# EAGLE board combo (EAGLE 7.2.0)
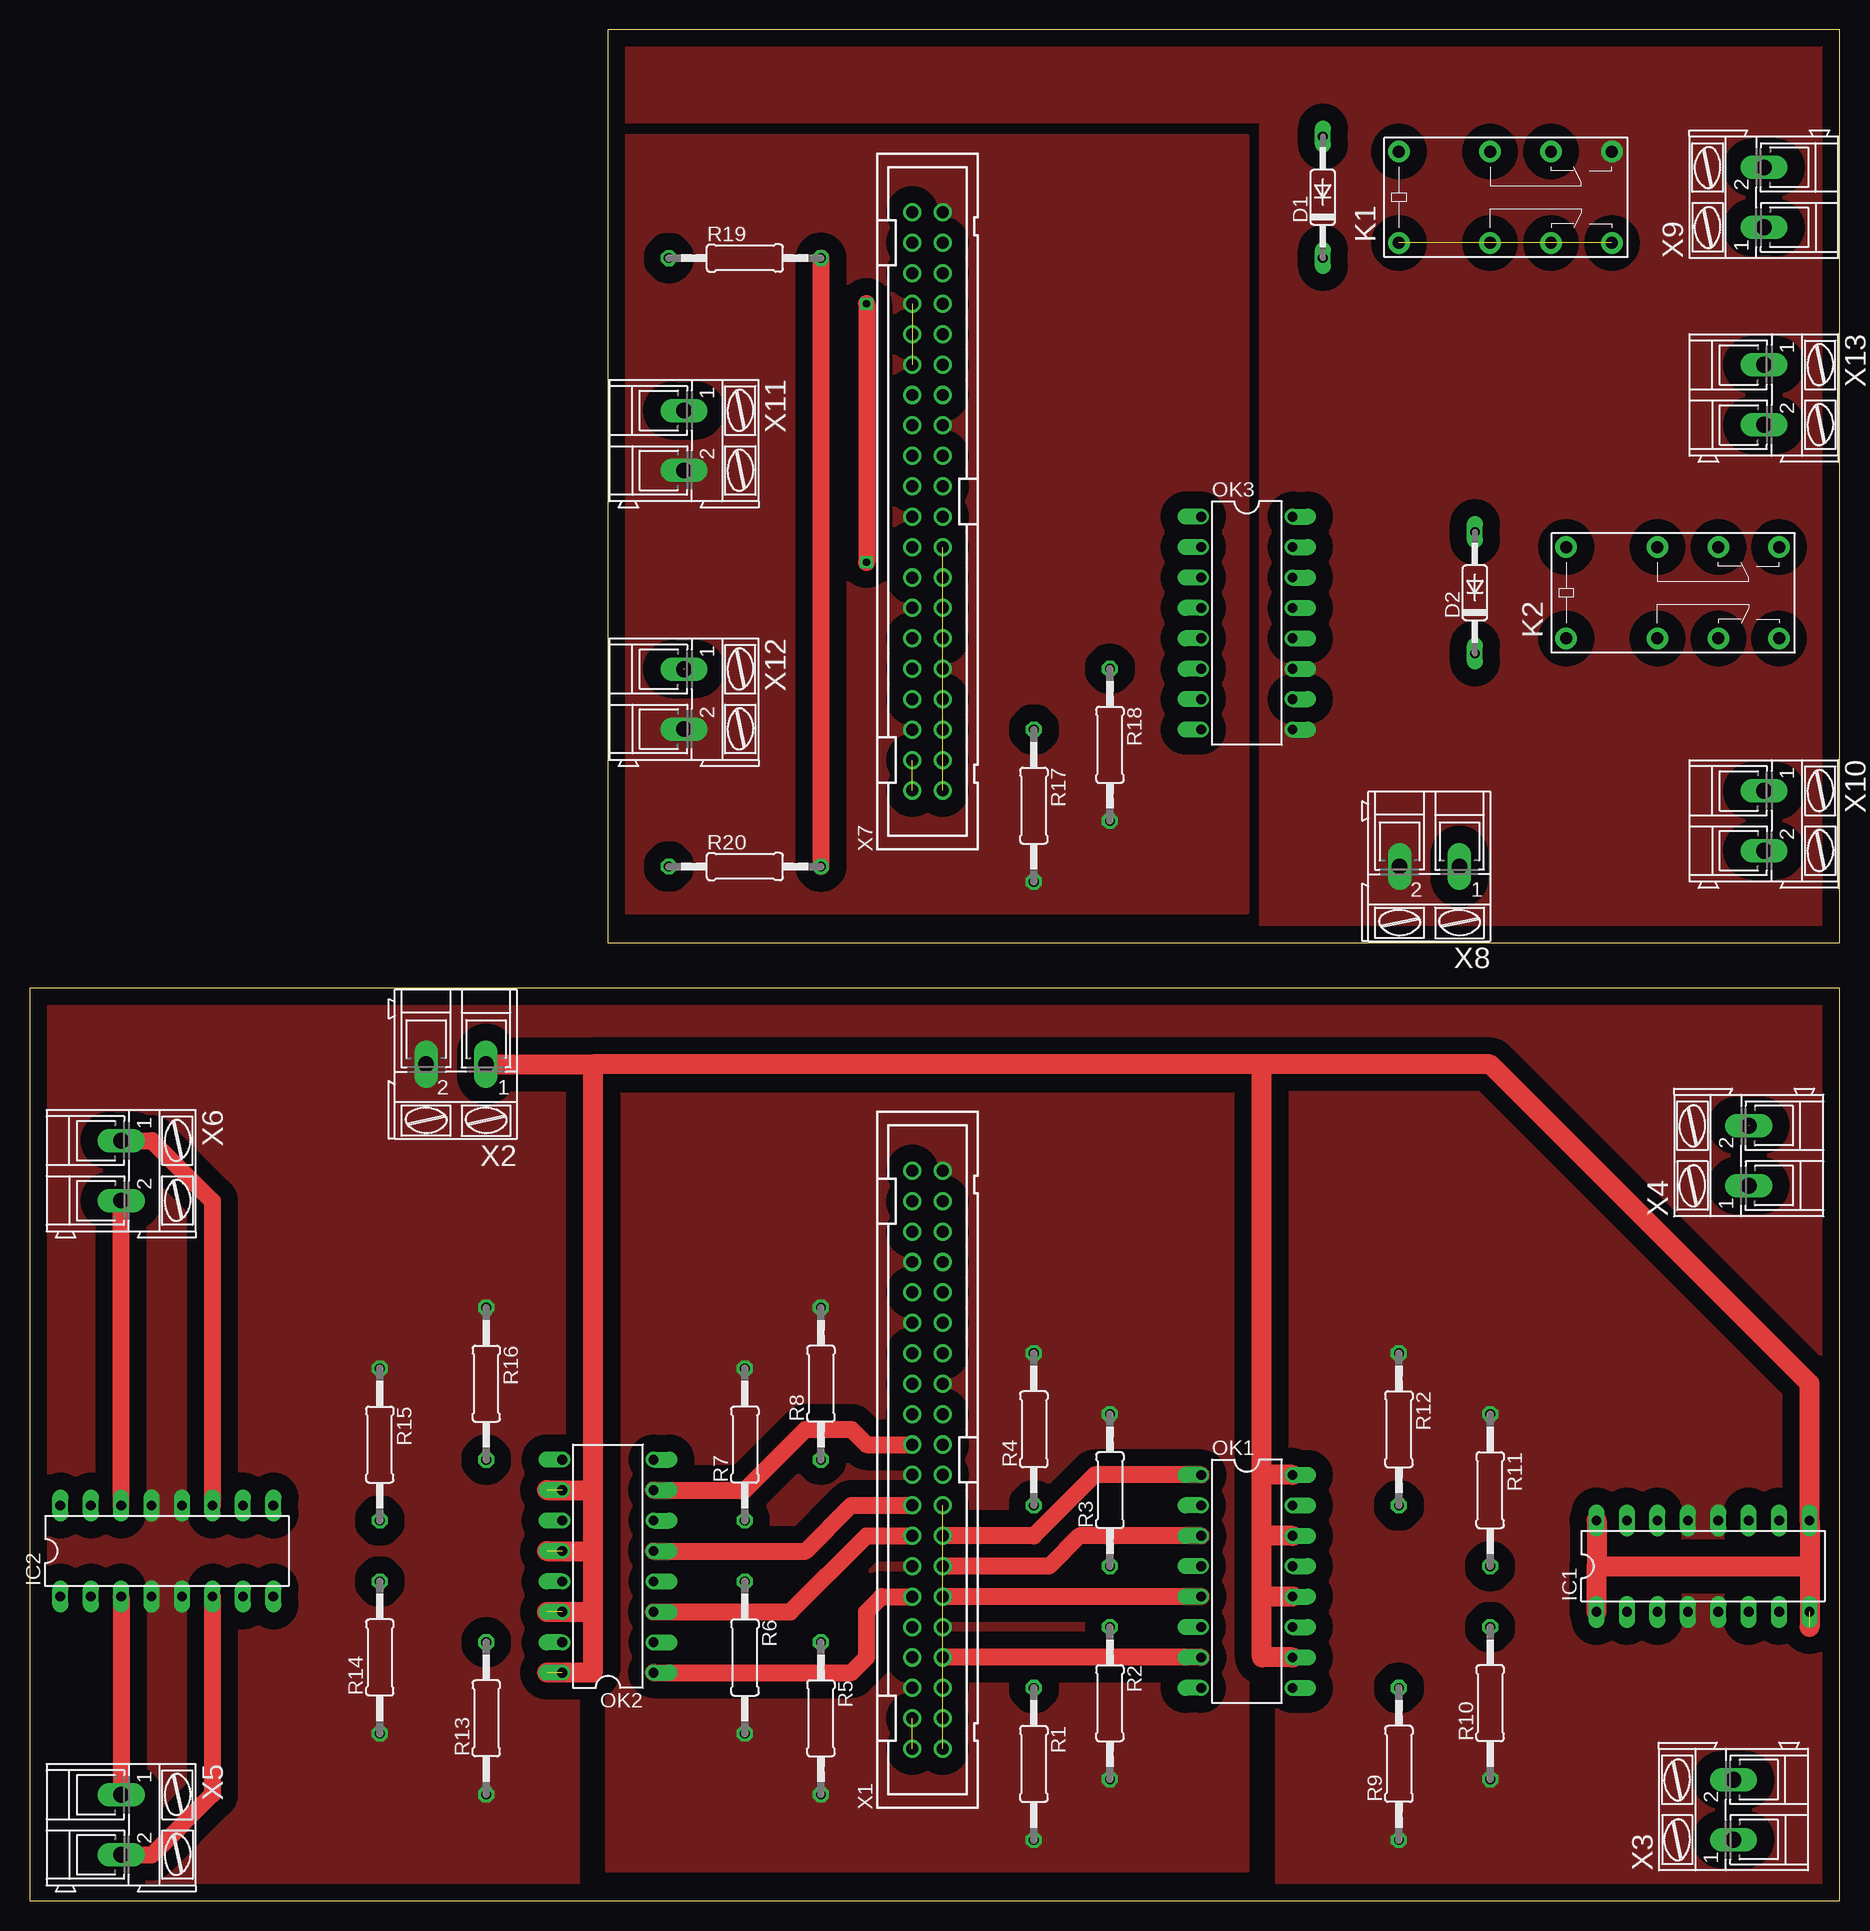
[diagram p0: board, top side]
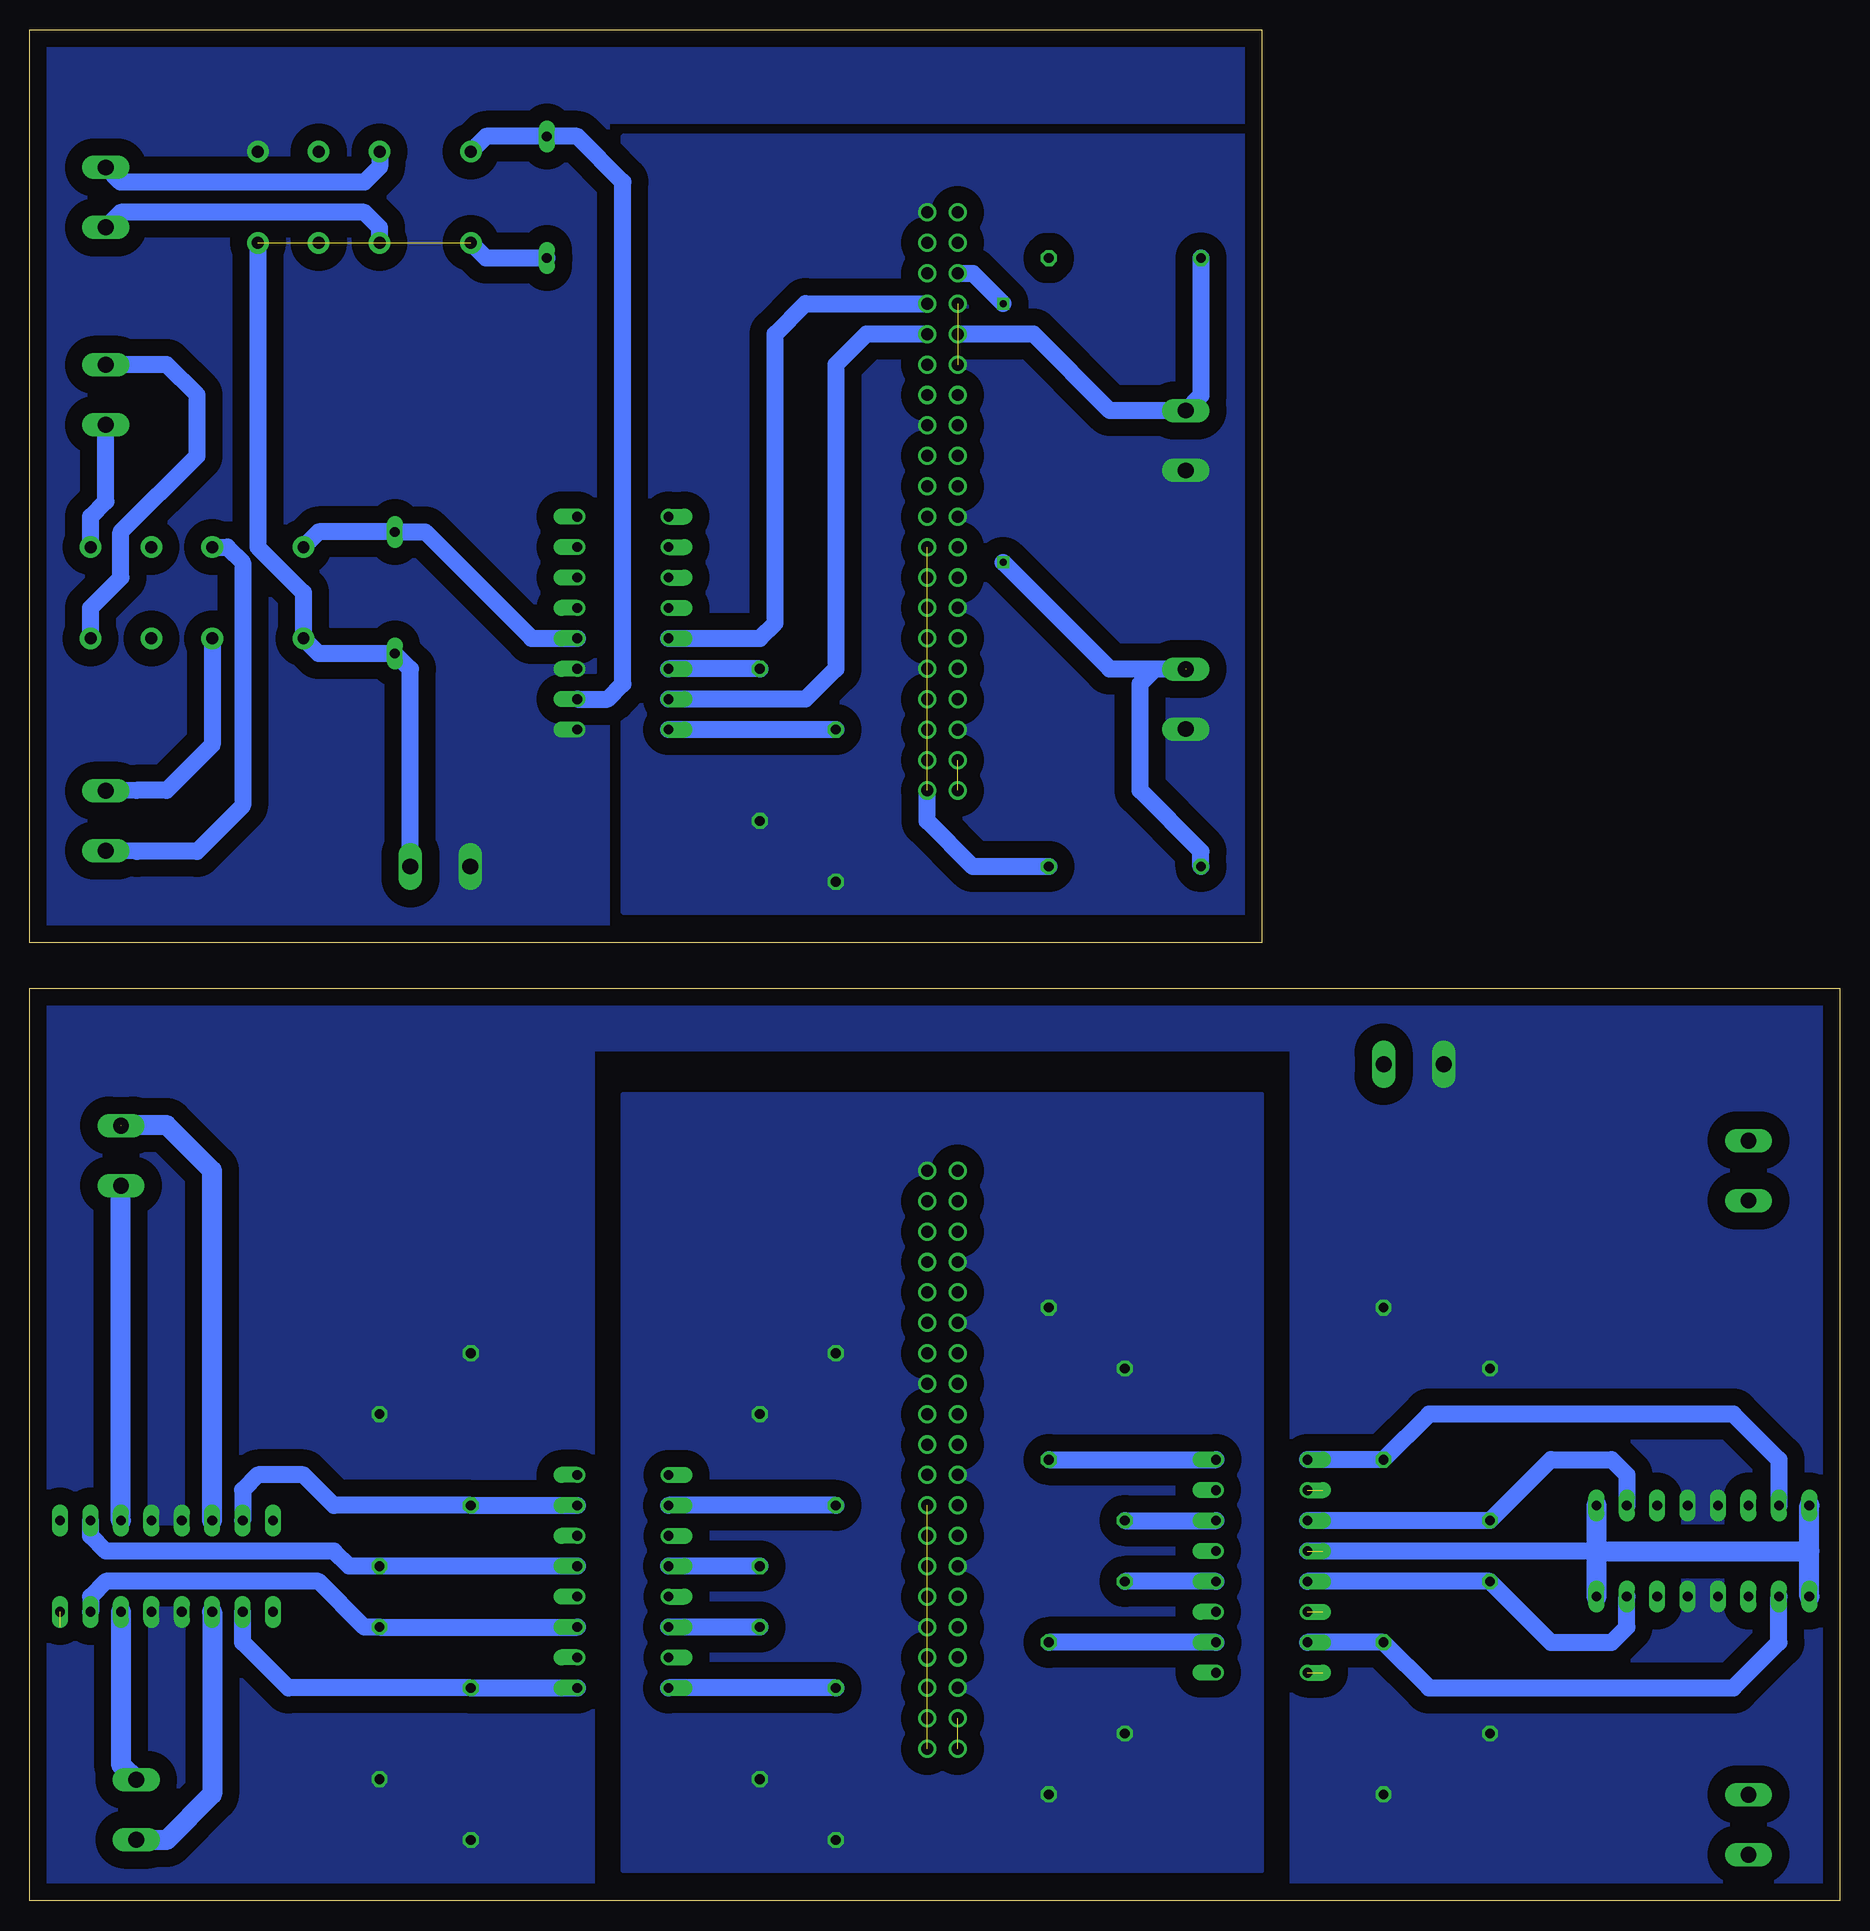
[diagram p1: board, bottom side, seen from below]

Size 151.11 x 156.21 mm. Coordinates in mm from the lower left corner, seen from the top.
Outline: 0,0 151.11,0 151.11,76.2 0,76.2 0,0
Outline: 48.26,80.01 151.11,80.01 151.11,156.21 48.26,156.21 48.26,80.01
Copper layers (1*16): Top 0.035mm / dielectric 1.5mm / Bottom 0.035mm
Design rules "default": minimum track width 10mil, minimum drill 24mil, track to track 8mil, track to pad 8mil, pad to pad 8mil, via to via 8mil, smd to smd 8mil, copper to edge 40mil, drill to drill 8mil, minimum pad ring 10mil, minimum via ring 8mil, stop-mask expansion 4mil, vias tented up to drill 0mil, thermal gap 10mil

## Footprints (pad centres in the part's own frame; a part is rotated, then mirrored left to right if it is on the bottom)
DO35-10 = drill 0.813 long: A 5.08,0; C -5.08,0
DIL16 = drill 0.813 long: 1 -8.89,-3.81; 2 -6.35,-3.81; 3 -3.81,-3.81; 4 -1.27,-3.81; 5 1.27,-3.81; 6 3.81,-3.81; 7 6.35,-3.81; 8 8.89,-3.81; 9 8.89,3.81; 10 6.35,3.81; 11 3.81,3.81; 12 1.27,3.81; 13 -1.27,3.81; 14 -3.81,3.81; 15 -6.35,3.81; 16 -8.89,3.81
G5V-2 = drill 1 pad 1.8: 1 -8.89,-3.81; 4 -1.27,-3.81; 6 3.81,-3.81; 8 8.89,-3.81; 9 8.89,3.81; 11 3.81,3.81; 13 -1.27,3.81; 16 -8.89,3.81
DIL16' = drill 0.813 offset: 1 -8.89,-3.81; 2 -6.35,-3.81; 3 -3.81,-3.81; 4 -1.27,-3.81; 5 1.27,-3.81; 6 3.81,-3.81; 7 6.35,-3.81; 8 8.89,-3.81; 9 8.89,3.81; 10 6.35,3.81; 11 3.81,3.81; 12 1.27,3.81; 13 -1.27,3.81; 14 -3.81,3.81; 15 -6.35,3.81; 16 -8.89,3.81
0207/12 = drill 0.813 octagon: 1 -6.35,0; 2 6.35,0
PAK100/2500-40 = drill 1 pad 1.422: 1 -24.13,-1.27; 2 -24.13,1.27; 3 -21.59,-1.27; 4 -21.59,1.27; 5 -19.05,-1.27; 6 -19.05,1.27; 7 -16.51,-1.27; 8 -16.51,1.27; 9 -13.97,-1.27; 10 -13.97,1.27; 11 -11.43,-1.27; 12 -11.43,1.27; 13 -8.89,-1.27; 14 -8.89,1.27; 15 -6.35,-1.27; 16 -6.35,1.27; 17 -3.81,-1.27; 18 -3.81,1.27; 19 -1.27,-1.27; 20 -1.27,1.27; 21 1.27,-1.27; 22 1.27,1.27; 23 3.81,-1.27; 24 3.81,1.27; 25 6.35,-1.27; 26 6.35,1.27; 27 8.89,-1.27; 28 8.89,1.27; 29 11.43,-1.27; 30 11.43,1.27; 31 13.97,-1.27; 32 13.97,1.27; 33 16.51,-1.27; 34 16.51,1.27; 35 19.05,-1.27; 36 19.05,1.27; 37 21.59,-1.27; 38 21.59,1.27; 39 24.13,-1.27; 40 24.13,1.27
AK300/2 = drill 1.321 long: 1 -2.515,0; 2 2.489,0

## Placement (x,y rotation side)
D1  1N4148DO35-10  [DO35-10]  107.95,142.24 90 top
D2  1N4148DO35-10  [DO35-10]  120.65,109.22 90 top
IC1  L293D  [DIL16]  139.7,27.94 0 top
IC2  L293D  [DIL16]  11.43,29.21 0 top
K1  G5V-2  [G5V-2]  123.19,142.24 0 top
K2  G5V-2  [G5V-2]  137.16,109.22 0 top
OK1  PS2501"  [DIL16']  101.6,26.67 270 top
OK2  PS2501"  [DIL16']  48.26,27.94 90 top
OK3  PS2501"  [DIL16']  101.6,106.68 270 top
R1  200  [0207/12]  83.82,11.43 270 top
R2  200  [0207/12]  90.17,16.51 270 top
R3  200  [0207/12]  90.17,34.29 90 top
R4  200  [0207/12]  83.82,39.37 90 top
R5  200  [0207/12]  66.04,15.24 270 top
R6  200  [0207/12]  59.69,20.32 270 top
R7  200  [0207/12]  59.69,38.1 90 top
R8  200  [0207/12]  66.04,43.18 90 top
R9  10K  [0207/12]  114.3,11.43 90 top
R10  10K  [0207/12]  121.92,16.51 90 top
R11  10K  [0207/12]  121.92,34.29 270 top
R12  10K  [0207/12]  114.3,39.37 270 top
R13  10K  [0207/12]  38.1,15.24 90 top
R14  10K  [0207/12]  29.21,20.32 90 top
R15  10K  [0207/12]  29.21,38.1 270 top
R16  10K  [0207/12]  38.1,43.18 270 top
R17  200  [0207/12]  83.82,91.44 270 top
R18  200  [0207/12]  90.17,96.52 270 top
R19  1k  [0207/12]  59.69,137.16 0 top
R20  1k  [0207/12]  59.69,86.36 0 top
X1  2540-  [PAK100/2500-40]  74.93,36.83 90 top
X2  [AK300/2]  35.56,69.85 180 top
X3  [AK300/2]  142.24,7.62 90 top
X4  [AK300/2]  143.51,62.23 90 top
X5  [AK300/2]  7.62,6.35 270 top
X6  [AK300/2]  7.62,60.96 270 top
X7  2540-  [PAK100/2500-40]  74.93,116.84 90 top
X8  [AK300/2]  116.84,86.36 180 top
X9  [AK300/2]  144.78,142.24 90 top
X10  [AK300/2]  144.78,90.17 270 top
X11  [AK300/2]  54.61,121.92 270 top
X12  [AK300/2]  54.61,100.33 270 top
X13  [AK300/2]  144.78,125.73 270 top

## Library data of the parts
D1 D2 = diode
IC1 IC2 = st-microelectronics; MPN: L293D; OC_FARNELL: 9589619; OC_NEWARK: 56P8249
K1 K2 = relay; MPN: G5V-2 5DC; OC_FARNELL: 9949488; OC_NEWARK: 78K5703
OK1-OK3 = optocoupler
R1-R20 = resistor
X1 X7 = con-3m; OC_FARNELL: unknown; OC_NEWARK: unknown
X2-X6 X8-X13 = con-ptr500; OC_FARNELL: unknown; OC_NEWARK: unknown

## Nets
+3V1: R19.2 R20.2 X7.1 X7.17
+3V3: X1.1 X1.17
+5V: X1.2 X1.4
+5V1: X7.2 X7.4
+24V: D1.C D2.C K1.1 K1.8 K2.1 X8.1
GND: R1.2 R2.2 R3.2 R4.2 R5.2 R6.2 R7.2 R8.2 X1.6 X1.9 X1.14 X1.20 X1.25 X1.30 X1.34 X1.39
GND1: IC1.4 IC1.5 IC1.12 IC1.13 IC2.4 IC2.5 IC2.12 IC2.13 R9.1 R10.1 R11.1 R12.1 R13.1 R14.1 R15.1 R16.1 X2.2
GND2: R17.2 R18.2 X7.6 X7.9 X7.14 X7.20 X7.25 X7.30 X7.34 X7.39 X11.2 X12.2
GND3: K1.9 OK3.9 OK3.11 X8.2
GPIO1: X7.29
GPIO2: OK3.5 X7.33
GPIO3: X7.35
GPIO4: X7.37
GPIO5: X1.29
GPIO6: X1.31
GPIO7: X7.38
GPIO8: X7.40
GPIO9: OK3.7 X7.31
GPIO12: X1.32
GPIO13: X1.33
GPIO16: X1.36
GPIO19: X1.35
GPIO20: X1.38
GPIO21: X1.40
GPIO26: X1.37
N$1: OK1.8 R1.1
N$2: OK1.6 R2.1
N$3: OK1.4 R3.1
N$4: OK1.2 R4.1
N$5: OK2.2 R5.1
N$6: OK2.4 R6.1
N$7: OK2.6 R7.1
N$8: OK2.8 R8.1
N$9: X1.3
N$10: X1.5
N$11: X1.8
N$12: X1.10
N$13: X1.19
N$14: X1.21
N$15: X1.23
N$16: X1.24
N$17: X1.26
N$18: X1.27
N$19: X1.28
N$20: IC1.2 OK1.9 R9.2
N$21: IC1.7 OK1.11 R10.2
N$22: IC1.10 OK1.13 R11.2
N$23: IC1.15 OK1.15 R12.2
N$24: IC2.2 OK2.15 R13.2
N$25: IC2.7 OK2.13 R14.2
N$26: IC2.10 OK2.11 R15.2
N$27: IC2.15 OK2.9 R16.2
N$28: IC1.3 X3.1
N$29: IC1.6 X3.2
N$30: IC1.14 X4.2
N$31: IC1.11 X4.1
N$32: IC2.3 X5.1
N$33: IC2.6 X5.2
N$34: IC2.11 X6.1
N$35: IC2.14 X6.2
N$36: OK1.1 X1.15
N$37: OK2.1 X1.12
N$38: OK2.3 X1.16
N$39: OK2.5 X1.18
N$40: OK2.7 X1.22
N$41: OK1.3 X1.13
N$42: OK1.5 X1.11
N$43: OK1.7 X1.7
N$44: X7.3
N$45: X7.5
N$46: X7.8
N$47: X7.10
N$48: X7.19
N$49: X7.21
N$50: X7.23
N$51: X7.24
N$52: X7.26
N$53: X7.27
N$54: X7.28
N$55: OK3.8 R17.1
N$56: OK3.6 R18.1
N$57: R19.1 X7.32 X11.1
N$58: D1.A K1.16 OK3.10
N$59: D2.A K2.16 OK3.12
N$60: K1.4 X9.1
N$61: K1.13 X9.2
N$62: X7.36 X12.1
N$63: R20.1 X12.1
N$64: K2.13 X10.2
N$65: K2.4 X10.1
N$66: K2.8 X13.1
N$67: K2.9 X13.2
VCC: IC1.1 IC1.8 IC1.9 IC1.16 IC2.1 IC2.8 IC2.9 IC2.16 OK1.10 OK1.12 OK1.14 OK1.16 OK2.10 OK2.12 OK2.14 OK2.16 X2.1

## Tracks (layer width: path | path; a pad name or v marks a point on that pad's centre or on a via)
+3V1  (1 unrouted)
  Top 1.422: R19.2 R20.2
  Bottom 1.422: R20.2 72.39,86.36 76.2,90.17 X7.1
+3V3  (1 unrouted)
+5V  (1 unrouted)
+5V1  (1 unrouted)
+24V  (1 unrouted)
  Bottom 1.422: D1.C 113.03,137.16 K1.1 | X8.1 119.36,102.84 D2.C 127,104.14 K2.1 128.27,109.22 132.08,113.03 K1.8
GND
  pour Bottom (isolate 1.422, no thermals): 48.26,67.31 101.6,67.31 101.6,2.54 48.26,2.54
  pour Top (isolate 1.422, no thermals): 48.26,67.31 101.6,67.31 101.6,2.54 48.26,2.54
GND1
  pour Bottom (isolate 1.422, no thermals): 0,76.2 0,0 45.72,0 45.72,71.12 104.14,71.12 104.14,0 151.13,0 151.13,76.2
  pour Top (isolate 1.422, no thermals): 0,0 45.72,0 45.72,68.58 104.14,68.58 104.14,0 151.13,0 151.13,76.2 0,76.2
GND2  (1 unrouted)
  pour Bottom (isolate 1.422, no thermals): 48.26,147.32 101.6,147.32 101.6,82.55 48.26,82.55
  pour Top (isolate 1.422, no thermals): 48.26,147.32 101.6,147.32 101.6,82.55 48.26,82.55
GND3
  pour Bottom (isolate 1.422, no thermals): 48.26,156.21 151.13,156.21 151.13,80.01 102.87,80.01 102.87,148.59 48.26,148.59
  pour Top (isolate 1.422, no thermals): 48.26,156.21 151.13,156.21 151.13,80.01 102.87,80.01 102.87,148.59 48.26,148.59
GPIO2
  Bottom 1.422: OK3.5 90.17,105.41 88.9,106.68 88.9,130.81 86.36,133.35 X7.33
GPIO9
  Bottom 1.422: X7.31 81.28,130.81 83.82,128.27 83.82,102.87 86.36,100.33 OK3.7
N$1
  Bottom 1.422: R1.1 OK1.8
N$2
  Bottom 1.422: R2.1 OK1.6
N$3
  Bottom 1.422: R3.1 OK1.4
N$4
  Bottom 1.422: R4.1 OK1.2
N$5
  Bottom 1.422: OK2.2 R5.1
N$6
  Bottom 1.422: OK2.4 R6.1
N$7
  Bottom 1.422: R7.1 OK2.6
N$8
  Bottom 1.422: R8.1 OK2.8
N$20
  Bottom 1.422: OK1.9 R9.2 129.54,17.78 133.35,21.59 IC1.2
N$21
  Bottom 1.422: OK1.11 R10.2 123.19,22.86 127,26.67 144.78,26.67 146.05,25.4 IC1.7
N$22
  Bottom 1.422: OK1.13 R11.2 124.46,27.94 125.73,29.21 144.78,29.21 146.05,30.48 IC1.10
N$23
  Bottom 1.422: OK1.15 R12.2 125.73,33.02 128.27,35.56 132.08,35.56 133.35,34.29 IC1.15
N$24
  Bottom 1.422: OK2.15 R13.2 34.29,17.78 8.89,17.78 5.08,21.59 IC2.2
N$25
  Bottom 1.422: OK2.13 R14.2 24.13,21.59 19.05,21.59 17.78,22.86 IC2.7
N$26
  Bottom 1.422: OK2.11 R15.2 24.13,36.83 19.05,36.83 17.78,35.56 IC2.10
N$27
  Bottom 1.422: OK2.9 R16.2 34.29,40.64 8.89,40.64 5.08,36.83 IC2.15
N$28
  Bottom 1.676: IC1.3 135.89,8.89 139.7,5.08 142.22,5.08 X3.1
N$29
  Bottom 1.676: IC1.6 143.51,11.38 X3.2
N$30  (1 unrouted)
  Bottom 1.676: IC1.14 135.89,60.96 139.7,64.77 143.51,64.77
N$31
  Bottom 1.676: IC1.11 X4.1
N$32
  Top 1.422: IC2.3 X5.1
N$33
  Top 1.422: IC2.6 15.24,8.89 10.16,3.81 7.67,3.81 X5.2
N$34
  Top 1.422: X6.1 10.19,63.48 15.24,58.42 IC2.11
N$35
  Top 1.422: IC2.14 X6.2
N$36
  Top 1.422: OK1.1 88.9,35.56 83.82,30.48 X1.15
N$37
  Top 1.422: OK2.1 68.58,19.05 69.85,20.32 69.85,24.13 71.12,25.4 X1.12
N$38
  Top 1.422: OK2.3 63.5,24.13 69.85,30.48 X1.16
N$39
  Top 1.422: OK2.5 64.77,29.21 68.58,33.02 X1.18
N$40
  Top 1.422: OK2.7 59.69,34.29 64.77,39.37 68.58,39.37 69.85,38.1 X1.22
N$41
  Top 1.422: OK1.3 87.63,30.48 85.09,27.94 X1.13
N$42
  Top 1.422: OK1.5 X1.11
N$43
  Top 1.422: OK1.7 X1.7
N$55
  Bottom 1.422: R17.1 OK3.8
N$56
  Bottom 1.422: R18.1 OK3.6
N$57
  Bottom 1.422: R19.1 53.34,125.7 X11.1 60.94,124.44 67.31,130.81 X7.32
N$58
  Bottom 1.422: K1.16 113.03,147.32 D1.A 105.41,147.32 101.6,143.51 101.6,101.6 102.87,100.33 OK3.10
N$59
  Bottom 1.422: K2.16 127,114.3 D2.A 118.11,114.3 109.22,105.41 OK3.12
N$60
  Bottom 1.422: K1.4 121.92,139.7 123.19,140.97 143.53,140.97 X9.1
N$61
  Bottom 1.422: K1.13 121.92,144.78 123.19,143.51 143.56,143.51 X9.2
N$62  (via drill 0.6)  (1 unrouted)
  Top 1.422: v69.85,133.35 v69.85,111.76
  Bottom 1.422: X7.36 72.39,135.89 v69.85,133.35 | v69.85,111.76 60.96,102.87 54.61,102.87
N$63  (1 unrouted)
  Bottom 1.422: R20.1 53.34,87.63 58.42,92.71 58.42,101.6 57.15,102.87 54.61,102.87
N$64
  Bottom 1.422: K2.13 134.62,113.03 133.35,111.76 133.35,91.44 137.16,87.63 142.19,87.63 X10.2
N$65
  Bottom 1.422: K2.4 135.89,96.52 139.7,92.71 142.22,92.71 X10.1
N$66
  Bottom 1.422: K2.8 146.05,107.95 143.51,110.49 143.51,114.3 137.16,120.65 137.16,125.73 139.7,128.27 142.22,128.27 X13.1
N$67
  Bottom 1.422: K2.9 146.05,115.57 144.78,116.84 X13.2
VCC  (5 unrouted)
  Top 1.676: X2.1 46.99,69.85 | 102.87,69.85 46.99,69.85 | 46.99,69.85 46.99,34.29 | 43.18,34.29 46.99,34.29 | 46.99,34.29 46.99,29.21 | 43.18,29.21 46.99,29.21 | 46.99,29.21 46.99,24.13 | 43.18,24.13 46.99,24.13 | 46.99,24.13 46.99,19.05 43.18,19.05 | OK1.16 102.87,35.56 | 102.87,35.56 102.87,69.85 | OK1.14 102.87,30.48 | 102.87,30.48 102.87,35.56 | OK1.12 102.87,25.4 | 102.87,25.4 102.87,30.48 | OK1.10 102.87,20.32 102.87,25.4 | 148.59,27.94 IC1.9 148.59,43.18 121.92,69.85 102.87,69.85 | 148.59,27.94 148.59,22.86 | IC1.1 130.81,27.94 | IC1.16 130.81,27.94 | 130.81,27.94 148.59,27.94
  Bottom 1.422: 20.32,29.21 OK2.12
  Bottom 1.676: IC2.1 2.54,29.21 | 2.54,29.21 IC2.16 | 20.32,29.21 IC2.8 | IC2.9 20.32,29.21 | 20.32,29.21 2.54,29.21